# EAGLE board ATtiny84 (EAGLE 6.4)
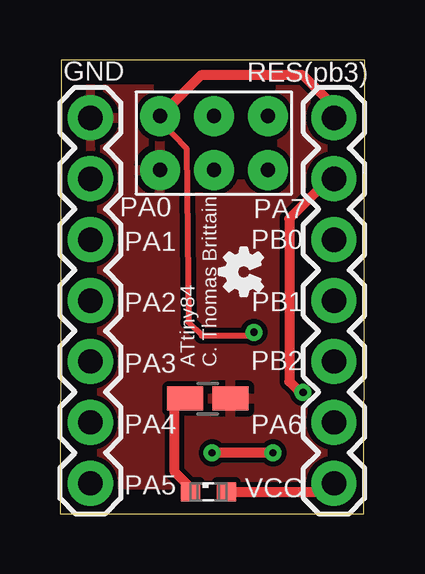
[diagram p0: board, top side]
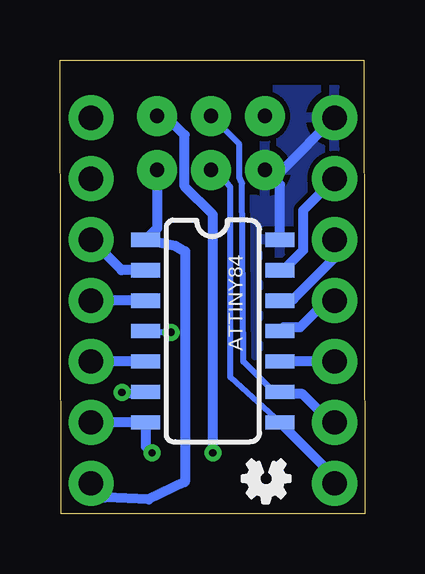
[diagram p1: board, bottom side, seen from below]

Size 12.73 x 18.92 mm. Coordinates in mm from the lower left corner, seen from the top.
Outline: 0,0 12.67,0 12.73,18.92 0.06,18.92 0,0
Copper layers (1*16): Top 0.035mm / dielectric 1.5mm / Bottom 0.035mm
Design rules "default *": minimum track width 10mil, minimum drill 24mil, track to track 8mil, track to pad 8mil, pad to pad 8mil, via to via 8mil, smd to smd 8mil, copper to edge 40mil, drill to drill 8mil, minimum pad ring 10mil, minimum via ring 8mil, stop-mask expansion 4mil, vias tented up to drill 0.3mm, thermal gap 10mil

## Footprints (pad centres in the part's own frame; a part is rotated, then mirrored left to right if it is on the bottom)
SO14 = smd 0.6 x 1.2: 1 -3.81,-2.8; 2 -2.54,-2.8; 3 -1.27,-2.8; 4 0,-2.8; 5 1.27,-2.8; 6 2.54,-2.8; 7 3.81,-2.8; 8 3.81,2.8; 9 2.54,2.8; 10 1.27,2.8; 11 0,2.8; 12 -1.27,2.8; 13 -2.54,2.8; 14 -3.81,2.8
1X07 = drill 1.016 pad 1.88: 1 0,0; 2 2.54,0; 3 5.08,0; 4 7.62,0; 5 10.16,0; 6 12.7,0; 7 15.24,0
SML0603 = smd 0.8 x 0.8: A 0.75,0; C -0.75,0
R0805W = smd 1.5 x 1: 1 -0.94,0; 2 0.94,0
POGO_PIN_SPI_PAD = drill 0.6 pad 1.676: GND 1,-1; MISO 3.25,-5.5; MOSI 1,-3.25; RST 3.25,-1; SCK 3.25,-3.25; VCC 1,-5.5

## Placement (x,y rotation side)
ATTINY84  ATTINY84  [SO14]  6.35,7.62 270 bottom
JP1  [1X07]  11.43,1.27 90 top
JP2  [1X07]  1.27,1.27 90 top
LED1  [SML0603]  6.19,0.91 0 top
R1  [R0805W]  6.17,4.81 180 top
U$1  [OSHW_FILLX70_NOTEXT]  8.44,9.09 90 top
U$2  POGO_PIN_SPI_PAD  [POGO_PIN_SPI_PAD]  3.17,13.34 90 top
U$3  [OSHW_FILLX70_NOTEXT]  3.14,2.24 180 bottom

## Library data of the parts
ATTINY84 = SparkFun-DigitalIC
JP1 JP2 = SparkFun-Connectors
LED1 = led
R1 = resistor
U$1 U$3 = ohw-logo
U$2 = Random parts

## Nets
GND: ATTINY84.14 JP2.7 R1.1 U$2.GND
N$1: LED1.C R1.2
PA0: ATTINY84.13 JP2.6
PA1: ATTINY84.12 JP2.5
PA2: ATTINY84.11 JP2.4
PA3: ATTINY84.10 JP2.3
PA4: ATTINY84.9 JP2.2 U$2.SCK
PA5: ATTINY84.8 JP2.1 U$2.MOSI
PA6: ATTINY84.7 JP1.2 U$2.MISO
PA7: ATTINY84.6 JP1.6
PB0: ATTINY84.2 JP1.5
PB1: ATTINY84.3 JP1.4
PB2: ATTINY84.5 JP1.3
PB3: ATTINY84.4 JP1.7 U$2.RST
VCC: ATTINY84.1 JP1.1 LED1.A U$2.VCC

## Tracks (layer width: path | path; a pad name or v marks a point on that pad's centre or on a via)
GND
  Bottom 0.406: ATTINY84.14 3.55,13.71 U$2.GND 3.44,14.34 JP2.7
  pour Bottom: 0,19.05 0,0 12.7,0 12.7,19.05
  pour Top: 0,19.05 0,0 12.7,0 12.7,19.05
N$1
  Top 0.406: LED1.C 5.44,1.09 4.79,1.74 4.79,4.37 R1.2
PA0
  Bottom 0.406: ATTINY84.13 3.41,10.16 2.58,10.99 2.58,12.66 JP2.6
PA1
  Bottom 0.406: JP2.5 1.27,10.66 2.98,8.95 3.49,8.95 ATTINY84.12
PA2
  Bottom 0.406: JP2.4 1.6,8.89 2.71,7.77 3.4,7.77 ATTINY84.11
PA3
  Bottom 0.406: JP2.3 ATTINY84.10
PA4
  Bottom 0.254: ATTINY84.9 3.81,5.08 5.08,6.35 5.13,13.78 5.25,14.04 5.25,15.41 U$2.SCK
  Bottom 0.406: JP2.2 1.43,3.81 2.61,4.99 3.46,4.99 ATTINY84.9 | U$2.SCK 6.42,16.25
PA5
  Bottom 0.254: U$2.MOSI 6.15,14.34 5.63,13.62 5.63,5.7 ATTINY84.8
  Bottom 0.406: JP2.1 1.27,1.53 ATTINY84.8
PA6  (via drill 0.3)
  Top 0.406: v8.89,2.54 v6.35,2.54
  Bottom 0.406: JP1.2 ATTINY84.7 9.15,2.8 v8.89,2.54 | v6.35,2.54 6.35,12.47 7.52,13.65 7.52,15.79 8.15,16.42 8.51,16.42 U$2.MISO
PA7  (via drill 0.3)
  Top 0.406: JP1.6 11.23,13.97 9.57,12.31 9.57,5.51 10.11,4.97 9.93,5.14 v10.14,5.06
  Bottom 0.406: v10.14,5.06 9.24,4.99 ATTINY84.6
PB0
  Bottom 0.406: ATTINY84.2 10.16,10.16 JP1.5
PB1
  Bottom 0.406: ATTINY84.3 JP1.4
PB2
  Bottom 0.406: ATTINY84.5 JP1.3
PB3  (via drill 0.3)
  Top 0.254: U$2.RST 4.17,16.4 5.27,15.24 5.36,7.99 5.92,7.43 7.96,7.43 v8.09,7.57
  Top 0.406: JP1.7 11.43,16.99 10.13,18.29 5.88,18.29 U$2.RST
  Bottom 0.254: v8.09,7.57 8.89,7.57 9.1,7.57
  Bottom 0.406: ATTINY84.4 8.94,7.62 8.89,7.57
VCC
  Top 0.406: LED1.A 11.07,0.92 JP1.1
  Bottom 0.406: U$2.VCC 8.68,11.9 ATTINY84.1 7.92,11.18 7.5,10.94 7.52,1.33 9.03,0.6 10.84,0.68 JP1.1

## Text on the board
_tsilk: GND | RES(pb3) | PA0 | PA7 | PA1 | PB0 | PA2 | PB1 | PA3 | ATtiny84 / C. Thomas Brittain | PB2 | PA4 | PA6 | PA5 | VCC